# Altium PCB tabdil motor.PcbDoc
Units mm, origin at the board's own origin, x right, y up, seen from the top; angles counter-clockwise.
Board outline 152.4 x 101.6 mm, 2 copper layers (Top Layer, Bottom Layer); 1 components, 0 nets, 19 pads, 0 vias.
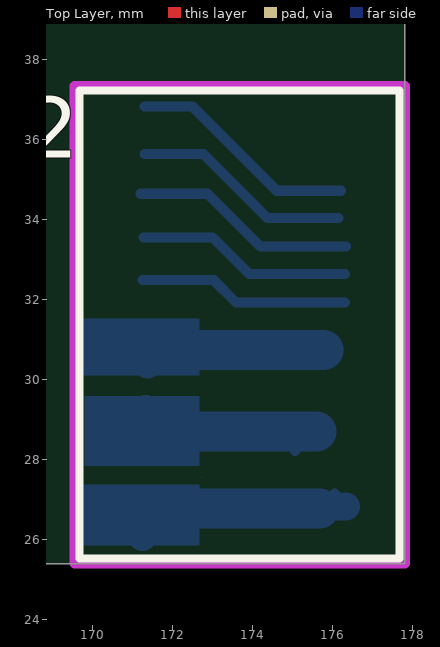
[diagram p0: Top Layer view]
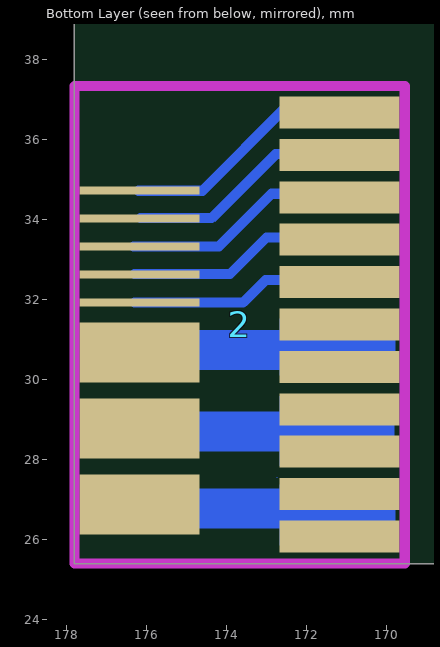
[diagram p1: Bottom Layer view, seen from below]

## Layer stack, top to bottom
Top Layer: signal copper 0.0356
Dielectric: dielectric 0.32, FR-4, Dk 4.8
Bottom Layer: signal copper 0.0356

## Board outline
25.4,25.4 177.8,25.4 177.8,127 25.4,127

## Design rules (kind name [scope] priority, off if disabled: settings)
Clearance [All] p1: gap=0.254
PolygonConnect [All] p1: connectstyle=Relief reliefconductorwidth=0.254 reliefentries=4 polygonreliefangle="90 Angle" airgapwidth=0.254
RoutingVias [All] p1: holewidth=0.711 width=1.27 viastyle="Through Hole" minholewidth=0.711 minwidth=1.27 maxholewidth=0.711 maxwidth=1.27
SolderMaskExpansion [All] p1: expansion=0.102
Width [All] p1: maxlimit=1 minlimit=0.254 preferedwidth=0.254 minimp=50.000000 maximp=50.000000 favimp=50.000000
28 further rules are at their usual default settings.

## Components (designator, comment, footprint, x,y, rotation, side; value= is the part's Value field where it differs from the comment)
2 "Header 8" "tabdil motor" 177.673,25.527 r90 top (schematic designator 1)

## Footprints (in the part's own frame and the unit in brackets; to place one, negate y for a bottom-side part, rotate by r counter-clockwise, add the part's x,y. Pads: shape width x height; smd on the part's side, far side on the other; paste and mask are expansions set on the pad)
"tabdil motor" [mm]
  rect 0.8x3 smd far side: 1(0.55,6.5) 1(1.61,6.5) 2(2.67,6.5) 2(3.73,6.5) 3(4.79,6.5) 3(5.85,6.5) 4(6.91,6.5) 5(7.97,6.5) 6(9.03,6.5) 7(10.09,6.5) 8(11.15,6.5)
  rect 1.5x3 smd far side: 1(1.35,1.5) 2(3.25,1.5) 3(5.15,1.5)
  rect 0.2x3 smd far side: 4(6.4,1.5) 5(7.1,1.5) 6(7.8,1.5) 7(8.5,1.5) 8(9.2,1.5)
  Bottom Layer region: 2.007,4.928 2.032,4.928 2.032,4.953 2.007,4.953
  Bottom Layer region: 0.33,5.004 1.854,5.004 1.854,7.899 0.33,7.899
  Bottom Layer region: 2.311,5.004 4.064,5.004 4.064,7.874 2.311,7.874
  Bottom Layer region: 4.572,5.004 5.994,5.004 5.994,7.899 4.572,7.899
  Bottom Layer lines w0.254: 9.119,6.477 9.119,4.801 7.798,3.48 7.798,1.346 ; 6.96,6.426 6.96,4.648 6.401,4.089 6.401,1.372 ; 8.026,6.401 8.026,4.674 7.112,3.759 7.112,1.372 ; 10.109,6.375 10.109,4.902 8.509,3.302 8.509,1.524 ; 11.303,6.375 11.303,5.182 9.195,3.073 9.195,1.473 ; 5.309,2.667 4.953,2.311 ; 2.692,2.616 3.226,2.083 ; 3.175,2.083 3.277,1.981 ; 5.207,1.905 5.258,1.854 ; 1.626,1.626 1.575,1.575
  Bottom Layer lines w0.7: 0.533,6.426 1.245,5.715 ; 3.734,6.35 3.175,5.791 ; 4.851,6.299 5.309,5.842 ; 1.245,2.007 1.295,1.956 1.295,1.346
  Bottom Layer lines w1: 5.385,6.452 5.207,6.274 5.207,1.905 ; 3.175,5.791 3.175,2.083 ; 1.245,5.715 1.245,2.007
  silkscreen extent 0,0 11.7,8

## Part data
2: "Header, 8-Pin"

## Nets (pads, with @x,y where several pads share a name; then routed paths per layer and width w, separated by ;. In a path a pad name is that pad's centre, name@x,y a point inside that pad or via, vN(x,y) a via of type N, cw(c..) or ccw(c..) an arc to the next point about the centre after c; other vN are vias at no path point)
pads on no net: 2.1 2.2 2.3 2.4 2.5 2.6 2.7 2.8

## Keep-outs
Keep-Out Layer:
  lines w0.254: 169.545,25.4 169.545,37.338 177.8,37.338 177.8,25.4 169.545,25.4